# Altium PCB CC1200_PCB.PcbDoc (part 2 of 2)
Units mm, origin at the board's own origin, x right, y up, seen from the top; angles counter-clockwise.
Board outline 98.5 x 50 mm, 4 copper layers (Top Layer, GND, PWR, Bottom Layer), stack 1.57 mm thick; 129 components, 82 nets, 475 pads, 283 vias.
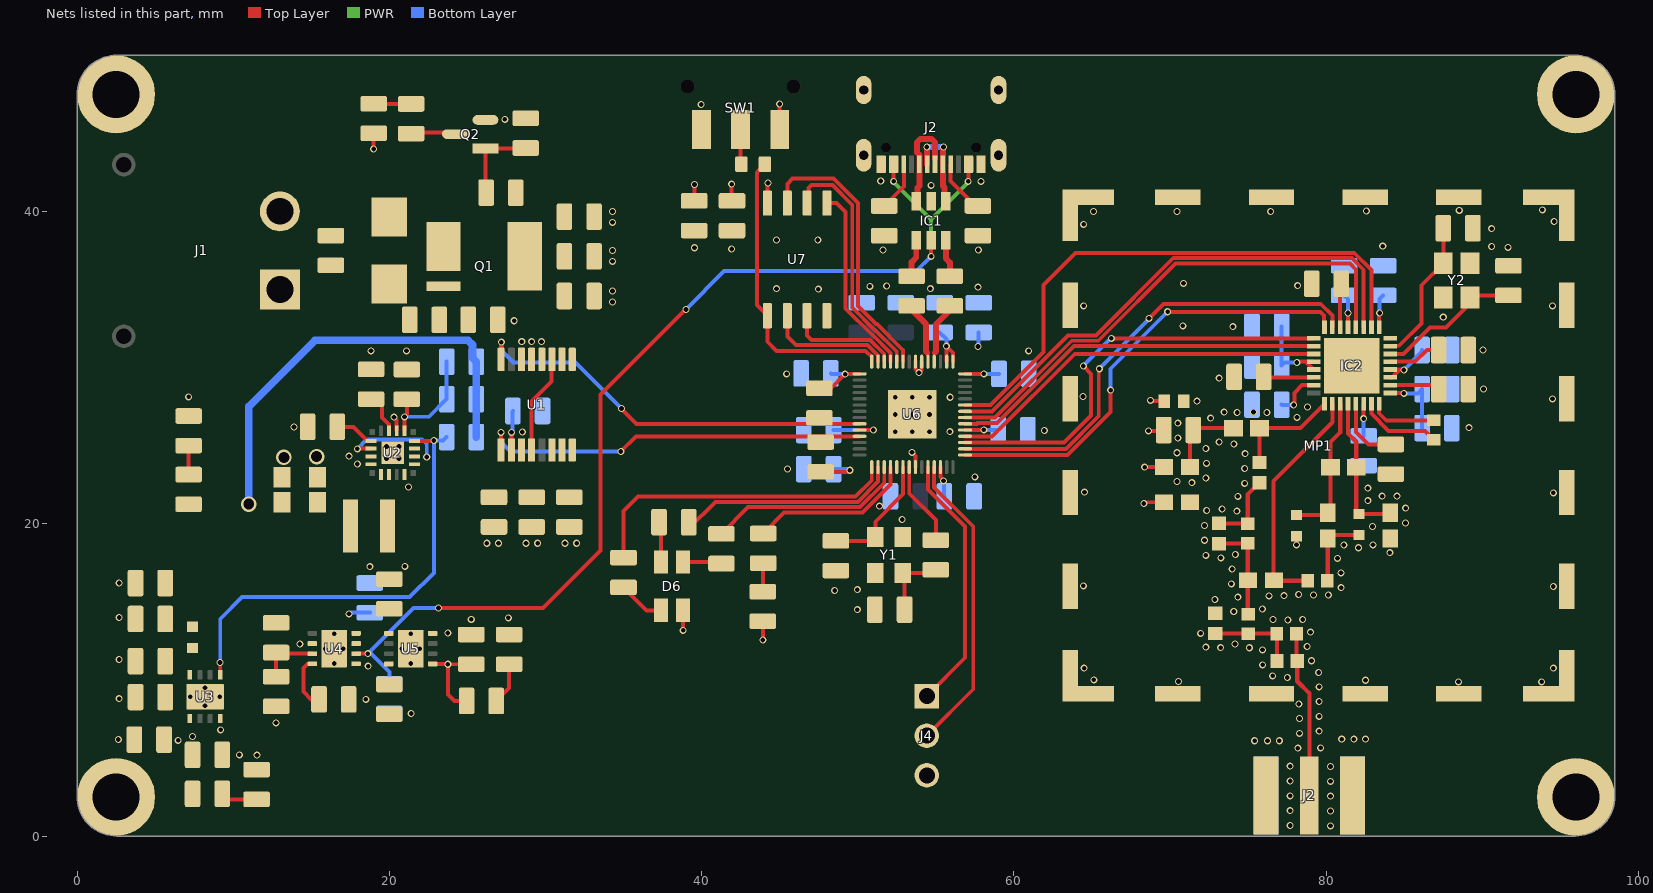
[diagram p4: the nets of this part, all layers, seen from the top]

## Via types
v1: diameter 0.45, hole 0.3, Top Layer to Bottom Layer, 267 vias
v2: diameter 0.6, hole 0.3, Top Layer to Bottom Layer, 9 vias
v3: diameter 0.5, hole 0.3, Top Layer to Bottom Layer, 4 vias
v4: diameter 1, hole 0.7, Top Layer to Bottom Layer, 3 vias

## Nets (pads, with @x,y where several pads share a name; then routed paths per layer and width w, separated by ;. In a path a pad name is that pad's centre, name@x,y a point inside that pad or via, vN(x,y) a via of type N, cw(c..) or ccw(c..) an arc to the next point about the centre after c; other vN are vias at no path point) (continued)
+3.3V: C1.1 C20.1 C23.1 C24.1 C25.1 C26.1 C27.1 C28.1 C29.1 C30.1 C36.1 C37.1 D1.A D5.A D6.1 D7.A R29.2 R30.2 SW1.1 U1.10 U5.1 U6.1 U6.10 U6.22 U6.26 U6.33 U6.42 U6.43 U6.44 U6.48 U6.49 U7.8 | length 40.3
  Top Layer w0.254: v1(19,44) D1.A@19,45 ; U5.1@22.775,11.025 23.725,11.025 v1(23.75,11) ; D5.A@24.95,8.65 24.175,8.65 23.75,9.075 v1(23.75,11) ; C20.1@25.25,11 v1(23.75,11) ; U1.10@27.818,24.721 27.822,24.724 27.822,25.846 v1(27.825,25.85) ; D6.1@38.8,14.45 38.8,13.2 v1(38.825,13.175) ; C36.1@39.525,40.675 39.55,40.7 v1(39.55,41.725) ; v1(41.925,41.75) 41.925,40.7 C37.1@41.95,40.675 ; v1(43.925,12.55) D7.A@43.925,13.75 ; U7.8@44.22,40.53 44.22,41.795 v1(44.25,41.825) ; SW1.1@45,45.25 v1(45,46.875) ; R29.2@47.55,28.675 48.3,28.675 v1(49.2,29.575) ; R30.2@47.625,23.325 49.4,23.325 v1(49.5,23.425) ; v1@49.175,29.6 U6.1@50.125,29.6 ; U6.10@50.125,26 v1(51,26) ; v1(53.475,24.575) 53.7,24.35 U6.22@53.7,23.625 ; U6.49@53.7,30.375 53.7,29.9 v1(53.925,29.675) 54.1,29.85 U6.48@54.1,30.375 ; U6.26@55.3,23.625 55.3,23.003 55.5,22.803 v1(55.5,22.75) ; v1(55.675,31.375) v1@55.7,31.35 ; U6.44@55.7,30.375 v1@55.7,31.35 ; U6.43@56.1,30.375 56.1,30.95 v1@55.7,31.35 ; U6.33@56.875,26 56.883,26.008 58.067,26.008 v1(58.075,26.016) ; U6.42@56.875,29.6 v1(58.075,29.6)
  Bottom Layer w0.254: v1(27.825,25.85) 27.825,25.903 27.895,25.973 27.895,27.199 C1.1@27.914,27.219 ; C26.1@48.275,29.625 48.325,29.575 v1(49.2,29.575) ; C30.1@48.45,23.5 49.425,23.5 v1(49.5,23.425) ; C27.1@48.45,26 v1(51,26) ; C24.1@55.25,32.25 55.675,31.825 v1(55.675,31.375) ; v1(55.5,22.75) 55.525,22.725 55.525,21.775 C28.1@55.55,21.75 ; v1(57.7,31.35) 57.75,31.4 C25.1@57.75,32.25 ; v1(58.075,26.016) 58.984,26.016 C29.1@59,26 ; v1(58.075,29.6) C23.1@59.05,29.6
+3.3VA: C12.1 C13.1 C38.2 C40.2 C41.2 C53.1 C54.1 C55.1 C56.1 C57.1 C58.1 C59.1 C60.1 C61.1 D4.A IC2.1 IC2.5 IC2.12 IC2.13 IC2.15 IC2.22 IC2.25 IC2.27 IC2.28 R27.1 U3.1 | length 27.4
  Top Layer w0.254: v1(68.325,21.3) cw(c68.4,21.3) 68.4,21.375 C41.2@69.623,21.375 ; v1(68.375,23.625) C40.2@69.622,23.625 ; v1(68.625,25.95) 69.55,25.95 ccw(c69.55,26) R27.1@69.6,26 ; v1(68.75,27.9) ccw(c68.8,27.9) 68.8,27.85 C38.2@69.625,27.85 ; v1(77.925,27.6) 77.963,27.638 77.963,28.377 78.461,28.875 IC2.15@79.2,28.875 ; v1(78.125,30.325) cw(c78.175,30.325) 78.175,30.375 78.688,30.375 ; IC2.13@79.2,29.875 79.188,29.875 78.688,30.375 ; IC2.12@79.2,30.375 78.688,30.375 ; IC2.5@81.4,32.575 v1(81.4,33.5) ; v1(82.4,26.725) IC2.22@82.4,27.675 ; IC2.1@83.4,32.575 83.4,33.475 v1(83.425,33.5) ; IC2.25@84.1,28.375 84.95,28.375 v1(84.975,28.35) ; IC2.27@84.1,29.375 84.225,29.375 84.725,29.875 ; IC2.28@84.1,29.875 84.725,29.875 ; v1(84.975,29.85) 84.95,29.875 84.725,29.875
  Bottom Layer w0.254: C61.1@77.15,27.625 77.175,27.6 v1(77.925,27.6) ; C59.1@77.15,32.625 C60.1@77.15,30.125 77.35,30.325 v1(78.125,30.325) ; C57.1@81.15,34.625 81.4,34.375 v1(81.4,33.5) ; C53.1@82.4,25.625 v1(82.4,26.725) ; v1(83.425,33.5) 83.425,34.4 C58.1@83.65,34.625 ; v1(84.975,28.35) 85.875,28.35 C55.1@86.15,28.625 C54.1@86.15,26.125 ; v1(84.975,29.85) 86.15,31.025 C56.1@86.15,31.125
  other v1: 6.475,6.125 7.4,6.375
+5: C8.1 C9.1 C14.2 C15.2 C16.2 C21.1 D3.A FB1.1 L1.2 R7.1 R8.2 R13.1 U4.8 | length 29.8
  Bottom Layer w0.254: v1(17.425,14.225) 17.478,14.225 17.553,14.3 C21.1@18.75,14.3
  Bottom Layer w0.5: v4(11,21.25) 11,27.5 15.25,31.75 25.032,31.75 25.325,31.457 25.325,30.625 C14.2@25.575,30.375 R8.2@25.575,27.975 R7.1@25.575,25.55
+24V: C3.1 C4.1 Q1.5-8 R2.1 R5.1 U1.1 U1.2 U1.3 U1.12 | length 6.3
  Top Layer w0.254: U1.12@29.118,24.721 29.118,27.818 30.4,29.1 30.4,30.503 U1.3@30.418,30.521
CC1200_CSN: IC2.11 U6.32 | length 24.5
  Top Layer w0.254: U6.32@56.875,25.6 57.737,25.6 57.762,25.575 58.6,25.575 63.9,30.875 IC2.11@79.2,30.875
CC1200_GPIO0: IC2.10 U6.34 | length 24.4
  Top Layer w0.254: U6.34@56.875,26.4 57.625,26.4 57.682,26.457 58.932,26.457 63.85,31.375 IC2.10@79.2,31.375
CC1200_GPIO2: IC2.4 U6.35 | length 33
  Top Layer w0.254: U6.35@56.875,26.8 58.79,26.8 63.708,31.718 65.404,31.718 70.35,36.664 81.516,36.664 81.916,36.264 81.916,34.484 81.9,34.468 IC2.4@81.9,32.575
CC1200_GPIO3: IC2.3 U6.36 | length 33.6
  Top Layer w0.254: U6.36@56.875,27.2 58.6,27.2 63.461,32.061 65.262,32.061 70.208,37.007 81.658,37.007 82.4,36.265 IC2.3@82.4,32.575
CC1200_MISO: IC2.9 U6.31 | length 27.7
  Top Layer w0.254: U6.31@56.875,25.2 63.225,25.2 64.95,26.925 64.95,29.6 v1(64.45,30.1) ; v1(66.245,31.875) IC2.9@79.2,31.875
  Bottom Layer w0.254: v1(64.45,30.1) 64.45,30.129 66.196,31.875 v1(66.245,31.875)
CC1200_MOSI: IC2.7 U6.30 | length 30.2
  Top Layer w0.254: U6.30@56.875,24.8 63.35,24.8 65.437,26.887 65.437,29.887 v1(65.475,29.925) ; v1(68.65,33.15) 69.575,34.075 79.655,34.075 80.4,33.33 IC2.7@80.4,32.575
  Bottom Layer w0.254: v1(65.475,29.925) 65.475,29.95 68.65,33.125 v1(68.65,33.15)
CC1200_RESET: IC2.2 U6.37 | length 36.7
  Top Layer w0.254: U6.37@56.875,27.6 58.515,27.6 61.9,30.985 61.9,35.3 63.95,37.35 81.8,37.35 82.9,36.25 IC2.2@82.9,32.575
CC1200_SCK: IC2.8 U6.29 | length 29.3
  Top Layer w0.254: U6.29@56.875,24.4 63.45,24.4 66.2,27.15 v1(66.2,28.55) ; v1(69.85,33.575) 69.875,33.55 79.65,33.55 79.875,33.325 79.875,32.6 IC2.8@79.9,32.575
  Bottom Layer w0.254: v1(66.2,28.55) 66.2,29.925 v1(69.85,33.575)
DCPL: C42.1 IC2.6 | length 2.4
  Top Layer w0.254: C42.1@80.85,35 80.9,34.95 IC2.6@80.9,32.575
DCPL_PFD_CHP: C44.1 IC2.26 | length 3.2
  Top Layer w0.254: IC2.26@84.1,28.875 86.95,28.875 C44.1@87.2,28.625
DCPL_VCO: C43.1 IC2.21 | length 4.4
  Top Layer w0.254: IC2.21@81.9,27.675 81.9,25.875 82.7,25.075 C43.1@84.15,25.075
DCPL_XOSC: C45.1 IC2.29 | length 3.4
  Top Layer w0.254: IC2.29@84.1,30.375 85.699,30.375 86.449,31.125 C45.1@87.2,31.125
FB: C14.1 R8.1 R11.1 U2.13 | length 7.6
  Top Layer w0.254: U2.13@20.975,25.956 v1(20.975,26.85) 21.125,27 R11.1@21.125,27.975
  Bottom Layer w0.254: v1(20.975,26.85) 22.55,26.85 R8.1@23.675,27.975 C14.1@23.675,30.375
GND: C1.2 C2.2 C3.2 C4.2 C5.2 C6.2 C7.2 C8.2 C9.2 C10.2 C11.2 C12.2 C13.2 C15.1 C16.1 C17.2 C18.2 C19.2 C20.2 C21.2 C22.2 C23.2 C24.2 C25.2 C26.2 C27.2 C28.2 C29.2 C30.2 C31.2 C32.2 C33.2 C34.2 C35.2 C36.2 C37.2 C38.1 C39.2 C41.1 C42.2 C43.2 C44.2 C45.2 C49.1 C53.2 C54.2 C55.2 C56.2 C57.2 C58.2 C59.2 C60.2 C61.2 C62.2 C63.2 D2.2 IC1.2 IC2.32 IC2.33 J1.N J2.2 J2.3 J2.4 J2.5 J2.A1B12 J2.B1A12 J2.SH J4.3 L5.1 MP1.1 pad.15 Q2.2 R4.2 R5.2 R6.2 R9.2 R10.2 R11.2 R12.2 R14.2 R15.2 R16.2 R25.2 R26.2 R28.2 SW1.3 U1.4 U1.5 U1.6 U1.11 U2.3 U2.4 U2.8 U2.14 U2.17 U3.4 U3.9 U3.10 U3.11 U3.12 U3.13 U4.2 U4.5 U4.9 U5.4 U5.9 U5.10 U5.11 U5.12 U5.13 U6.19 U6.57 U7.4 Y1.2 Y1.4 Y2.2 Y2.4 | length 1.5
  Top Layer w0.254: v1(13.9,26.2) v1@13.903,26.203 ; v1(20.3,26.825) 20.475,26.65 U2.14@20.475,25.956 ; v1(78.1,18.65) L5.1@78.1,19.2
  other v1: 80.275,0.65 77.7,0.675 80.275,1.6 77.7,1.625 80.275,2.55 77.7,2.575 80.275,3.5 77.7,3.525 80.275,4.45 77.7,4.475 11.525,5.175 10.4,5.2 78.191,5.628 79.65,5.65 75.425,6.1 76.25,6.1 77,6.1 2.65,6.175 81,6.2 81.775,6.2 82.525,6.2 78.292,6.573 79.558,6.713 9.2,6.8 12.75,7.25 78.292,7.523 79.558,7.663 21.4,7.85 78.25,8.45 79.55,8.613 18.5,8.75 2.7,8.8 79.55,9.55 88.475,9.875 93.8,9.875 70.55,9.9 82.525,9.975 65.125,10 77.517,10.15 76.574,10.262 79.525,10.475 64.5,10.75 94.55,10.75 18.65,10.875 75.937,10.966 79.063,11.224 2.7,11.3 75.925,11.925 73.243,12.062 75.085,12.058 72.293,12.093 78.785,12.132 14.275,12.3 74.165,12.292 71.962,12.983 23.75,13 78.994,13.059 77.545,13.837 25.25,13.875 76.596,13.867 78.495,13.867 27.625,13.975 2.7,14 74.083,14.381 49.975,14.5 75.917,14.533 72.875,15.15 74.342,15.294 76.346,15.381 77.296,15.394 79.192,15.433 80.142,15.433 78.243,15.468 48.525,15.725 49.975,15.775 80.965,15.908 94.55,15.975 64.45,16.025 73.929,16.15 2.7,16.2 80.952,16.858 73.986,17.098 18.75,17.25 21,17.275 80.733,17.782 73.257,17.812 72.3,17.975 74.183,18.027 84.075,18.15 82.068,18.462 81.135,18.642 83,18.65 26.25,18.75 27,18.75 28.75,18.75 29.5,18.75 31.25,18.75 32,18.75 72.212,18.941 82.975,19.825 72.212,19.891 85.08,20.05 52.85,20.275 74.279,20.802 72.35,20.85 73.339,20.938 85.094,21 51.4,21.125 82.675,21.475 74.342,21.75 83.587,21.768 84.537,21.769 94.55,21.975 64.525,22.025 82.675,22.275 21.225,22.35 74.787,22.589 71.395,22.631 70.449,22.708 72.299,22.923 57.5,23 45.5,23.5 74.787,23.539 17.95,23.825 72.343,23.872 19.825,24.175 20.625,24.175 17.425,24.325 74.814,24.489 70.452,24.545 72.296,24.821 19.825,24.95 20.625,24.95 74.093,25.108 73.152,25.233 70.501,25.493 28.525,25.875 55.9,25.9 61.95,25.975 89.15,26.15 70.501,26.443 72.604,26.758 78.139,26.809 74.3,27.125 76.2,27.125 73.472,27.142 75.35,27.15 78.811,27.481 71.725,27.85 94.5,28 55.925,28.1 7.15,28.125 64.425,28.15 90.075,28.625 73.15,29.325 45.45,29.6 18.825,31.075 21.1,31.075 60.95,31.075 90.05,31.125 28.483,31.664 29.118,31.664 29.753,31.664 74.025,32.625 70.825,32.675 28,33 87.5,33.225 64.475,33.95 94.5,33.95 34.3,34.2 34.3,34.9 47.475,35.025 44.8,35.05 54.65,35.05 57.7,35.15 50.775,35.2 51.85,35.225 78.175,35.25 70.864,35.399 34.3,36.8 34.3,37.5 51.625,37.525 57.725,37.525 41.925,37.6 39.55,37.675 91.65,37.7 90.6,37.75 83.625,37.775 44.799,38.173 47.45,38.175 90.6,38.9 64.475,39.175 34.3,39.3 94.6,39.35 34.3,40 65.1,40 70.45,40 76.45,40 82.575,40.025 88.525,40.075 93.85,40.1 54.7,41.675 57.9,41.925 51.475,41.95 27.4,45.9 39.975,46.85
  other v2: 52.4,25.9 53.5,25.9 54.6,25.9 52.4,27 53.5,27 54.6,27 52.4,28.1 53.5,28.1 54.6,28.1
  other v3: 16.475,11.05 15.9,12 17.05,12 16.475,12.95
  other v4: 13.25,24.25 15.35,24.3
I2C0_SCL: R30.1 U1.9 U6.11 | length 25.4
  Top Layer w0.254: v1(27.15,25.85) 27.159,25.841 27.159,24.73 U1.9@27.168,24.721 ; v1(34.825,24.625) 35.8,25.6 U6.11@50.125,25.6
  Bottom Layer w0.254: v1(27.15,25.85) 27.156,25.844 27.156,25.244 27.775,24.625 v1(34.825,24.625)
I2C0_SDA: R29.1 U1.8 U6.9 | length 26.5
  Top Layer w0.254: U1.8@27.168,30.521 27.168,31.618 v1(27.175,31.625) ; v1(34.875,27.375) 34.875,27.35 35.825,26.4 45.4,26.4 48.65,26.4 U6.9@50.125,26.4
  Bottom Layer w0.254: v1(27.175,31.625) 27.175,31.1 27.95,30.325 31.925,30.325 v1(34.875,27.375)
ILIM: R14.1 U4.4 | length 3.4
  Top Layer w0.254: U4.4@15.075,11.025 14.775,11.025 14.5,10.75 14.5,9.25 15,8.75 R14.1@15.5,8.75
LNA_N: C39.1 IC2.20 L3.2 L4.2 | length 9.4
  Top Layer w0.267: IC2.20@81.4,27.675 81.4,25.775 81.926,25.249 L3.2@81.926,23.625 81.926,20.799 L4.2@82.1,20.625 84.023,20.625 C39.1@84.1,20.702
LNA_P: C48.1 IC2.19 L3.1 L5.2 | length 9.4
  Top Layer w0.267: L5.2@78.1,20.55 79.948,20.55 C48.1@80.1,20.702 80.274,20.876 L3.1@80.274,23.625 80.274,25.224 80.9,25.85 IC2.19@80.9,27.675
NetC10_1: C10.1 C11.1 FB1.2 U3.8
NetC35_1: C35.1 R24.1 Y1.3 | length 4.6
  Top Layer w0.254: C35.1@53,14.5 53,16.725 Y1.3@52.875,16.85 54.8,16.85 R24.1@55,17.05
NetC40_1: C40.1 L2.2 R27.2 | length 5.1
  Top Layer w0.267: C40.1@71.275,23.625 71.275,25.775 R27.2@71.5,26 71.625,26.125 L2.2@74.074,26.125
NetC46_1: C46.1 J2.1 L8.2 | length 10.7
  Top Layer w0.267: L8.2@78.102,12.95 78.102,11.248 C46.1@78.15,11.2 78.15,9.913 78.925,9.138 J2.1@78.925,2.6
NetC46_2: C46.2 C49.2 L7.2 L8.1 | length 5.7
  Top Layer w0.267: C49.2@72.9,12.975 76.825,12.975 L8.1@76.85,12.95 C46.2@76.85,11.2
NetC47_1: C47.1 C50.2 L6.1 | length 4.8
  Top Layer w0.267: C50.2@73.15,20.025 74.951,20.025 L6.1@74.975,20.001 74.975,21.875 C47.1@75.725,22.625
NetC48_2: C48.2 L4.1 L9.1 | length 4.8
  Top Layer w0.267: L9.1@80.076,16.35 80.1,16.374 C48.2@80.1,19.048 80.327,19.275 L4.1@82.1,19.275
NetC50_1: C50.1 C51.2 L6.2 L7.1 | length 6.4
  Top Layer w0.267: C50.1@73.15,18.725 74.951,18.725 L6.2@74.975,18.749 74.975,14.226 L7.1@75,14.201
NetC52_1: C52.1 IC2.23 | length 5.3
  Top Layer w0.254: IC2.23@82.9,27.675 82.9,27.05 84,25.95 86.325,25.95 C52.1@86.9,25.375
NetC52_2: C52.2 IC2.24 | length 4.3
  Top Layer w0.254: IC2.24@83.4,27.675 83.4,27.075 83.85,26.625 C52.2@86.9,26.625
NetD1_K: D1.K R3.1 | length 2.6
  Top Layer w0.254: D1.K@19,46.9 ccw(c19.018,46.9) 19.018,46.882 R3.1@21.395,46.882 ; R3.1@21.36,46.646 R3.1@21.36,46.882
NetD3_K: D3.K R9.1 | length 1.8
  Top Layer w0.254: D3.K@7.147,23.15 R9.1@7.147,24.999
NetD4_K: D4.K R10.1 | length 2.3
  Top Layer w0.254: D4.K@9.3,2.7 9.65,2.35 R10.1@11.5,2.35
NetD5_K: D5.K R16.1 | length 2.7
  Top Layer w0.254: D5.K@26.85,8.65 27.675,9.475 R16.1@27.675,11
NetD6_2: D6.2 R20.1 | length 3
  Top Layer w0.254: R20.1@35,15.925 36.475,14.45 D6.2@37.4,14.45
NetD6_3: D6.3 R21.1 | length 2.1
  Top Layer w0.254: D6.3@38.8,17.55 R21.1@40.922,17.55
NetD6_4: D6.4 R22.1 | length 2.9
  Top Layer w0.254: R22.1@37.25,20.775 R22.1@37.4,20.625 ; D6.4@37.4,17.55 R22.1@37.4,20.225
NetD7_K: D7.K R23.1 | length 2
  Top Layer w0.254: R23.1@43.9,17.6 43.925,17.575 D7.K@43.925,15.65
NetIC2_14: IC2.14 R28.1 | length 3.2
  Top Layer w0.254: R28.1@76,29.4 76.025,29.375 IC2.14@79.2,29.375
NetJ2_A5: J2.A5 R26.1 | length 3.5
  Top Layer w0.254: J2.A5@55.95,43.022 55.95,41.95 57.55,40.35 R26.1@57.7,40.35
NetJ2_B5: J2.B5 R25.1 | length 3.2
  Top Layer w0.254: R25.1@51.7,40.35 52.95,41.6 J2.B5@52.95,43.022
NetQ1_4: Q1.4 R1.2 R4.1
NetQ2_1: Q2.1 R2.2 R6.1 | length 5.4
  Top Layer w0.254: R2.2@26.2,41.2 26.158,41.242 Q2.1@26.158,44.035 28.711,44.035 R6.1@28.737,44.061
NetQ2_3: Q2.3 R3.2 | length 2.7
  Top Layer w0.254: R3.2@21.5,45.05 24.104,45.05 Q2.3@24.204,44.95
NetR18_2: R18.2 SW1.2 | length 2.2
  Top Layer w0.254: SW1.2@42.5,45.25 42.5,43.075 R18.2@42.55,43.025
PA: C47.2 IC2.17 L2.1 | length 7
  Top Layer w0.267: C47.2@75.725,23.925 75.725,26.124 L2.1@75.726,26.125 78.35,26.125 IC2.17@79.9,27.675
PG: R7.2 U2.12 U3.5 | length 29.1
  Top Layer w0.254: v1(9.163,11.118) 9.175,11.106 U3.5@9.175,10.325 ; U2.12@21.625,25.306 22.831,25.306 v1(22.85,25.325)
  Bottom Layer w0.254: v1@9.175,11.106 9.175,13.9 10.575,15.3 21.3,15.3 22.85,16.85 v1(22.85,25.325) 23.45,25.325 R7.2@23.675,25.55
QSPI_SCLK: U6.52 U7.6 | length 15.7
  Top Layer w0.254: U7.6@46.76,40.53 46.862,40.632 46.862,41.512 47.05,41.7 48.375,41.7 49.65,40.425 49.65,33.84 51.043,32.447 51.08,32.447 52.5,31.027 U6.52@52.5,30.375
QSPI_SD0: U6.53 U7.5 | length 12.2
  Top Layer w0.254: U7.5@48.03,40.53 48.645,40.53 49.225,39.95 49.225,33.78 50.901,32.104 50.938,32.104 52.1,30.942 U6.53@52.1,30.375
QSPI_SD1: U6.55 U7.2 | length 8
  Top Layer w0.254: U7.2@45.49,33.32 45.49,31.985 46.043,31.432 50.64,31.432 51.3,30.772 U6.55@51.3,30.375
QSPI_SD2: U6.54 U7.3 | length 7.2
  Top Layer w0.254: U7.3@46.76,33.32 46.76,32.065 47.05,31.775 50.782,31.775 51.7,30.857 U6.54@51.7,30.375
QSPI_SD3: U6.51 U7.7 | length 17.9
  Top Layer w0.254: U7.7@45.49,40.53 45.49,41.765 45.825,42.1 48.46,42.1 50.031,40.529 50.031,33.944 51.186,32.79 51.222,32.79 52.9,31.111 U6.51@52.9,30.375
QSPI_SS: R18.1 U6.56 U7.1 | length 19
  Top Layer w0.254: R18.1@44.05,43.025 44.05,42.925 43.777,42.652 43.692,42.652 43.543,42.503 43.543,33.997 U7.1@44.22,33.32 44.22,31.655 44.8,31.075 50.496,31.075 U6.56@50.873,30.698
RT: R12.1 U2.1 | length 2.5
  Top Layer w0.254: R12.1@16.672,26.203 17.707,26.203 18.604,25.306 U2.1@18.825,25.306
STAT_LED: R23.2 U6.18 | length 10.6
  Top Layer w0.254: R23.2@43.95,19.375 45.293,20.718 50.298,20.718 52.1,22.52 U6.18@52.1,23.625
STAT_LED_B: R20.2 U6.15 | length 20.6
  Top Layer w0.254: R20.2@35,17.825 35,20.825 35.922,21.747 49.872,21.747 50.9,22.775 U6.15@50.9,23.625
STAT_LED_G: R22.2 U6.16 | length 14.3
  Top Layer w0.254: R22.2@39.175,19.7 40.879,21.404 50.014,21.404 51.3,22.69 U6.16@51.3,23.625
STAT_LED_R: R21.2 U6.17 | length 12.8
  Top Layer w0.254: R21.2@41.275,19.35 42.986,21.061 50.156,21.061 51.7,22.605 U6.17@51.7,23.625
SW: L1.1 U2.5 U2.6
SWCLK: J4.1 U6.24 | length 16.7
  Top Layer w0.254: J4.1@54.425,8.965 56.876,11.416 56.876,19.824 54.5,22.2 U6.24@54.5,23.625
SWD: J4.2 U6.25 | length 19.5
  Top Layer w0.254: J4.2@54.425,6.425 57.4,9.4 57.4,19.825 54.9,22.325 U6.25@54.9,23.625
TR: C17.1 U2.15 | length 2.7
  Top Layer w0.254: C17.1@18.831,27.981 19.163,27.981 19.536,27.608 19.536,26.789 19.975,26.35 U2.15@19.975,25.956
TRX_SW: C51.1 IC2.18 L9.2 | length 15.1
  Top Layer w0.267: L9.2@78.824,16.35 76.675,16.35 76.625,16.4 76.625,22.725 80.4,26.5 IC2.18@80.4,27.675
USB_CON_N: IC1.1 J2.A7 J2.B7 | length 5.7
  Top Layer w0.381: v1@54.389,44.089 54.45,44.029 J2.A7@54.45,43.022 ; v1(55.5,44.125) 55.45,44.075 J2.B7@55.45,43.022 55.45,41.641 55.572,41.518 55.572,40.728 IC1.1@55.65,40.65
  Bottom Layer w0.381: v1(54.425,44.125) v1(55.5,44.125)
USB_CON_P: IC1.3 J2.A6 J2.B6 | length 6.3
  Top Layer w0.381: IC1.3@53.75,40.65 53.828,40.728 53.828,41.518 53.95,41.64 53.95,43.621 53.8,43.771 53.8,44.427 54.023,44.65 54.727,44.65 54.95,44.427 54.95,43.781 54.944,43.776 J2.A6@54.944,43.407
USB_N: R19.1 U6.46 | length 3.5
  Top Layer w0.381: 54.95,30.95 55.017,31.017 55.017,32.768 R19.1@56.2,33.95
USB_P: R17.1 U6.47 | length 3.5
  Top Layer w0.381: R17.1@53.2,33.95 54.382,32.768 54.382,31.017 54.45,30.95
USBD_N: IC1.6 R19.2 | length 2.4
  Top Layer w0.381: IC1.6@55.65,38.15 55.65,36.975 55.9,36.725 R19.2@55.9,35.85
USBD_P: IC1.4 R17.2 | length 2.4
  Top Layer w0.381: R17.2@53.45,35.85 53.45,36.75 53.75,37.05 IC1.4@53.75,38.15
Vbus: C22.1 IC1.5 J2.A4B9 J2.B4A9 U4.6 | length 68.3
  Top Layer w0.254: U4.6@17.875,11.675 v1(18.625,11.675) ; v1(23.15,14.6) 29.85,14.6 33.525,18.275 33.525,28.275 38.975,33.725 v1(39,33.725) ; v1(52.3,41.925) J2.B4A9@52.3,43.022 ; v1(54.7,37.125) IC1.5@54.7,38.15 ; v1(57.075,41.925) 57.1,41.95 J2.A4B9@57.1,43.022
  PWR w0.254: v1(52.3,41.925) 52.3,41.875 54.7,39.475 ; v1(54.7,37.125) 54.7,39.475 ; v1(57.075,41.925) 57.075,41.872 56.977,41.774 56.977,41.752 54.7,39.475
  Bottom Layer w0.254: C22.1@20,9.75 20,10.5 18.825,11.675 v1(18.625,11.675) 21.55,14.6 v1(23.15,14.6) ; v1(39,33.725) 41.45,36.175 53.75,36.175 v1(54.7,37.125)
VCC: C5.1 C6.1 C7.1 U1.14 U1.15 U1.16 U2.2 U2.9 U2.10 U2.11 | length 6.5
  Top Layer w0.254: v1(17.95,24.8) 17.956,24.806 U2.2@18.825,24.806
  Bottom Layer w0.254: v1(17.95,24.8) 18.541,25.391 22.109,25.391 22.4,25.1 v1(22.4,24.275)
Vselect_OUT: C18.1 C19.1 U4.7 U5.5 U5.8
VSNS: R13.2 R15.1 U4.3 | length 3.9
  Top Layer w0.254: R15.1@12.75,10.2 R13.2@12.75,11.75 12.825,11.675 U4.3@15.075,11.675
XIN: C34.1 U6.20 Y1.1 | length 7.8
  Top Layer w0.254: C34.1@48.6,18.9 50.875,18.9 Y1.1@51.125,19.15 51.125,20.125 52.9,21.9 U6.20@52.9,23.625
XOSC_Q1: C62.1 IC2.30 Y2.1 | length 9.3
  Top Layer w0.254: IC2.30@84.1,30.875 84.95,30.875 86.65,32.575 87.675,32.575 89.207,34.107 Y2.1@89.207,34.479 89.352,34.625 C62.1@91.675,34.625
XOSC_Q2: C63.1 IC2.31 Y2.3 | length 9.4
  Top Layer w0.254: IC2.31@84.1,31.375 84.123,31.398 84.673,31.398 86.1,32.825 86.1,35.273 Y2.3@87.507,36.679 87.507,38.779 C63.1@87.307,38.979
XOUT: R24.2 U6.21 | length 5.4
  Top Layer w0.254: U6.21@53.3,23.625 53.3,21.95 55,20.25 R24.2@55,18.95
XT30IN: C2.1 D2.1 J1.P Q1.1-3 R1.1
pads on no net: IC2.16 J1.S1 J1.S2 J2.A8 J2.B8 J2.MH SW1. U1.7 U1.13 U2.7 U2.16 U2.18 U2.19 U2.20 U2.21 U3.2 U3.3 U3.6 U3.7 U4.1 U5.2 U5.3 U5.6 U5.7 U6.2 U6.3 U6.4 U6.5 U6.6 U6.7 U6.8 U6.12 U6.13 U6.14 U6.27 U6.28 U6.38 U6.39 U6.40 U6.41

## Polygon pours and split planes (outlines as drawn)
GND on Top Layer "NONET_L-01_P-001" (solid, pour order 17): 95.96,50.019 cw(c95.96,47.479) 98.5,47.479 98.5,2.54 cw(c95.96,2.54) 95.96,0 84.5,0.019 12.5,0.019 2.54,0 cw(c2.54,2.54) 0,2.54 0,47.479 cw(c2.54,47.479) 2.54,50.019 15.544,50.019
+5 on Top Layer "NONET_L-01_P-001" (solid, pour order 9): 5.913,22.012 4.988,21.087 4.988,13.237 5.188,13.037 13.613,13.037 14.288,13.712 17.063,13.712 17.475,13.3 17.475,12.812 17.537,12.75 18.55,12.75 18.763,12.963 18.763,15.537 18.013,16.287 18.013,21.812 17.813,22.012
Vselect_OUT on Top Layer "NONET_L-01_P-001" (solid, pour order 11): 20.35,10.8 20.95,10.2 20.95,9.25 20.8,9.1 19.125,9.1 19,9.225 19,10.95 19,11.825 18.75,12.075 17.7,12.075 17.575,12.2 17.575,12.45 17.7,12.575 18.75,12.575 19,12.825 19,15 19.25,15.25 20.75,15.25 21,15 21,13.8 20.35,13.15 20.35,12.825 20.275,12.75 19.725,12.75 19.525,12.55 19.525,11.4 19.675,11.25 20.275,11.25 20.35,11.175
+3.3VA on Top Layer "NONET_L-01_P-001" (solid, pour order 14): 8,4.4 8,1.9 7.8,1.7 6.9,1.7 6.7,1.9 6.7,3.95 6.45,4.2 5.1,4.2 5,4.3 5,6.925 5.175,7.1 6.9,7.1 7,7.2 7,7.8 7.1,7.9 7.4,7.9 7.5,7.8 7.5,7.1 8,6.6
NetC10_1 on Top Layer "NONET_L-01_P-001" (solid, pour order 13): 7.7,12.4 7.8,12.3 7.8,11.4 7.4,11 7.4,10.1 7.3,10 6.9,10 6.5,9.6 6.5,8.2 6.2,7.9 5.1,7.9 5,8 5,11.9 5.5,12.4 6.4,12.4
VCC on Top Layer "NONET_L-01_P-001" (solid, pour order 3): 32.039,25.568 32.547,25.06 32.547,21.123 32.42,20.996 24.8,20.996 22.133,23.663 21.244,23.663 21.117,23.79 21.117,24.806 21.244,24.933 25.054,24.933 26.451,23.536 29.88,23.536 30.134,23.79 30.134,25.441 30.261,25.568
NetQ1_4 on Top Layer "NONET_L-01_P-001" (solid, pour order 6): 24.8,35.601 25.689,34.712 25.689,32.045 25.562,31.918 22.387,31.918 22.133,32.172 22.133,35.347 22.387,35.601
SW on Top Layer "NONET_L-01_P-001" (solid, pour order 4): 20.101,23.536 20.228,23.409 20.228,22.52 20.736,22.012 20.736,18.075 20.609,17.948 19.339,17.948 19.085,18.202 19.085,21.631 19.212,21.758 19.212,22.52 19.212,23.409 19.339,23.536
+24V on Top Layer "NONET_L-01_P-001" (solid, pour order 2): 27.467,42.332 27.975,42.84 31.658,42.84 32.293,42.205 32.293,29.886 31.912,29.505 30.388,29.505 30.134,29.759 30.134,31.918 27.467,34.585 27.467,36.617
XT30IN on Top Layer "NONET_L-01_P-001" (solid, pour order 1): 12,37.5 20.519,37.5 22.519,39.538 24.546,39.538 25.054,39.03 25.054,36.363 24.546,35.855 22.133,35.855 21.879,35.601 21.879,32.172 21.625,31.918 12.082,31.918 10.83,33.17 10.83,36.33
+3.3VA on PWR "NONET_L-01_P-001" (solid, pour order 20): 95.96,0 ccw(c95.96,2.54) 98.5,2.54 98.5,47.46 ccw(c95.96,47.46) 95.96,50 88.5,50 63.8,50 62.4,48.6 62.4,18.1 54.1,9.8 6.4,9.8 5,8.4 5,1.2 6.2,0
+3.3V on PWR "NONET_L-01_P-001" (solid, pour order 21): 2.54,50 ccw(c2.54,47.46) 0,47.46 0,12.4 2.2,10.2 53.9,10.2 62,18.3 62,48.6 60.6,50
GND on Bottom Layer "NONET_L-01_P-001" (solid, pour order 18): 2.54,50 ccw(c2.54,47.46) 0,47.46 0,2.54 ccw(c2.54,2.54) 2.54,0 5.5,0 95.96,0 ccw(c95.96,2.54) 98.5,2.54 98.5,47.46 ccw(c95.96,47.46) 95.96,50
GND on GND "NONET_L-01_P-001" (solid, pour order 15): 2.54,0 cw(c2.54,2.54) 0,2.54 0,47.46 cw(c2.54,47.46) 2.54,50 95.96,50 cw(c95.96,47.46) 98.5,47.46 98.5,2.54 cw(c95.96,2.54) 95.96,0

## Other copper
Top Layer:
  pour cut-out: 77.476,12.407 77.432,12.341 77.35,12.286 77.253,12.267 77.248,12.267 77.248,11.904 77.275,11.904 77.372,11.884 77.454,11.829 77.5,11.761 77.546,11.829 77.628,11.884 77.704,11.9 77.704,12.267 77.699,12.267 77.602,12.286 77.52,12.341
  pour cut-out: 76.227,21.957 76.175,21.946 75.609,21.946 75.373,21.71 75.373,20.658 75.404,20.658 75.501,20.639 75.584,20.584 75.639,20.501 75.658,20.404 75.658,19.598 75.639,19.501 75.584,19.419 75.518,19.375 75.584,19.331 75.639,19.249 75.658,19.152 75.658,18.346 75.639,18.249 75.584,18.166 75.501,18.111 75.404,18.092 75.373,18.092 75.373,17.135 75.576,17.135 75.673,17.116 75.755,17.061 75.81,16.978 75.823,16.913 75.836,16.978 75.891,17.061 75.974,17.116 76.071,17.135 76.227,17.135
  pour cut-out: 74.292,19.627 73.854,19.627 73.854,19.6 73.834,19.503 73.779,19.421 73.711,19.375 73.779,19.329 73.834,19.247 73.854,19.15 73.854,19.123 74.292,19.123 74.292,19.152 74.311,19.249 74.366,19.331 74.432,19.375 74.366,19.419 74.311,19.501 74.292,19.598
  pour cut-out: 80.502,26.039 77.023,22.56 77.023,17.135 77.229,17.135 77.326,17.116 77.409,17.061 77.464,16.978 77.483,16.881 77.483,16.748 78.167,16.748 78.167,16.779 78.186,16.876 78.241,16.959 78.324,17.014 78.421,17.033 79.227,17.033 79.324,17.014 79.406,16.959 79.45,16.893 79.494,16.959 79.576,17.014 79.673,17.033 79.702,17.033 79.702,18.215 79.594,18.215 79.497,18.234 79.414,18.289 79.359,18.372 79.34,18.469 79.34,19.628 79.359,19.725 79.414,19.807 79.497,19.862 79.562,19.875 79.497,19.888 79.414,19.943 79.359,20.025 79.34,20.122 79.34,20.152 78.689,20.152 78.684,20.128 78.629,20.046 78.547,19.991 78.45,19.971 77.75,19.971 77.653,19.991 77.571,20.046 77.516,20.128 77.496,20.225 77.496,20.875 77.516,20.972 77.571,21.054 77.653,21.109 77.75,21.129 78.45,21.129 78.547,21.109 78.629,21.054 78.684,20.972 78.689,20.948 79.34,20.948 79.34,21.281 79.359,21.378 79.414,21.461 79.497,21.516 79.594,21.535 79.876,21.535 79.876,22.842 79.671,22.842 79.574,22.861 79.491,22.916 79.436,22.999 79.417,23.096 79.417,24.154 79.436,24.251 79.491,24.334 79.574,24.389 79.671,24.408 79.876,24.408 79.876,25.224 79.895,25.321 79.934,25.414 79.937,25.423 79.949,25.44 79.992,25.505 80.502,26.015
  pour cut-out: 81.114,25.501 80.672,25.059 80.672,24.408 80.877,24.408 80.974,24.389 81.056,24.334 81.1,24.268 81.144,24.334 81.226,24.389 81.323,24.408 81.528,24.408 81.528,25.084 81.119,25.494
  pour cut-out: 80.002,26.996 79.784,26.996 78.631,25.844 78.577,25.807 78.549,25.789 78.532,25.781 78.447,25.746 78.369,25.731 78.35,25.727 76.583,25.727 76.583,25.596 76.564,25.499 76.509,25.416 76.426,25.361 76.329,25.342 76.123,25.342 76.123,24.604 76.175,24.604 76.272,24.584 76.354,24.529 76.409,24.447 76.429,24.35 76.429,23.5 76.409,23.403 76.354,23.321 76.286,23.275 76.354,23.229 76.409,23.147 76.422,23.085 80.002,26.665
  pour cut-out: 560 vertices and 0 holes, not listed, extent 70.442,-0.194 84.86,28.354

## Silkscreen, mask and mechanical layers (free items; w line width, h text height)
Top Overlay:
  text "BOOT" at 34.5,49.75 h4 r270
  text "USB-C" at 60,49.75 h4 r270
  text "VIN" at 14.475,47.325 h2.5 r270
  text "CC1200" at 60,41.5 h4 r270
  text "FLASH" at 40,36.75 h4 r270
  text "24V IN" at 1,30.5 h4 r270
  text "RP2040" at 58.5,23.75 h4 r270
  text "5V" at 6.025,20.425 h2.5 r270
  text "Status" at 36.5,12.5 h4 r270
  text "3.3V" at 29.125,10.525 h2.5 r270
  text "SWD" at 49.55,9.375 h4 r270
  text "ANT" at 71,6.375 h4 r270
  text "3.3VA" at 12.75,5.525 h2.5 r270

## Text inside footprints (layer, text, board x,y; h text height)
D1: Mechanical 13 "+" at 20,44.183 h1 r270
D3: Mechanical 13 "+" at 8.147,20.433 h1 r270
D4: Mechanical 13 "+" at 6.583,1.7 h1 r180
D5: Mechanical 13 "+" at 24.133,7.65 h1 r180
D7: Mechanical 13 "+" at 44.925,12.933 h1 r270